# Altium PCB ch32v003f4p6.PcbDoc
Units mm, origin at the board's own origin, x right, y up, seen from the top; angles counter-clockwise.
Board outline 34.68 x 28.58 mm, 2 copper layers (Top Layer, Bottom Layer); 32 components, 41 nets, 129 pads, 48 vias.
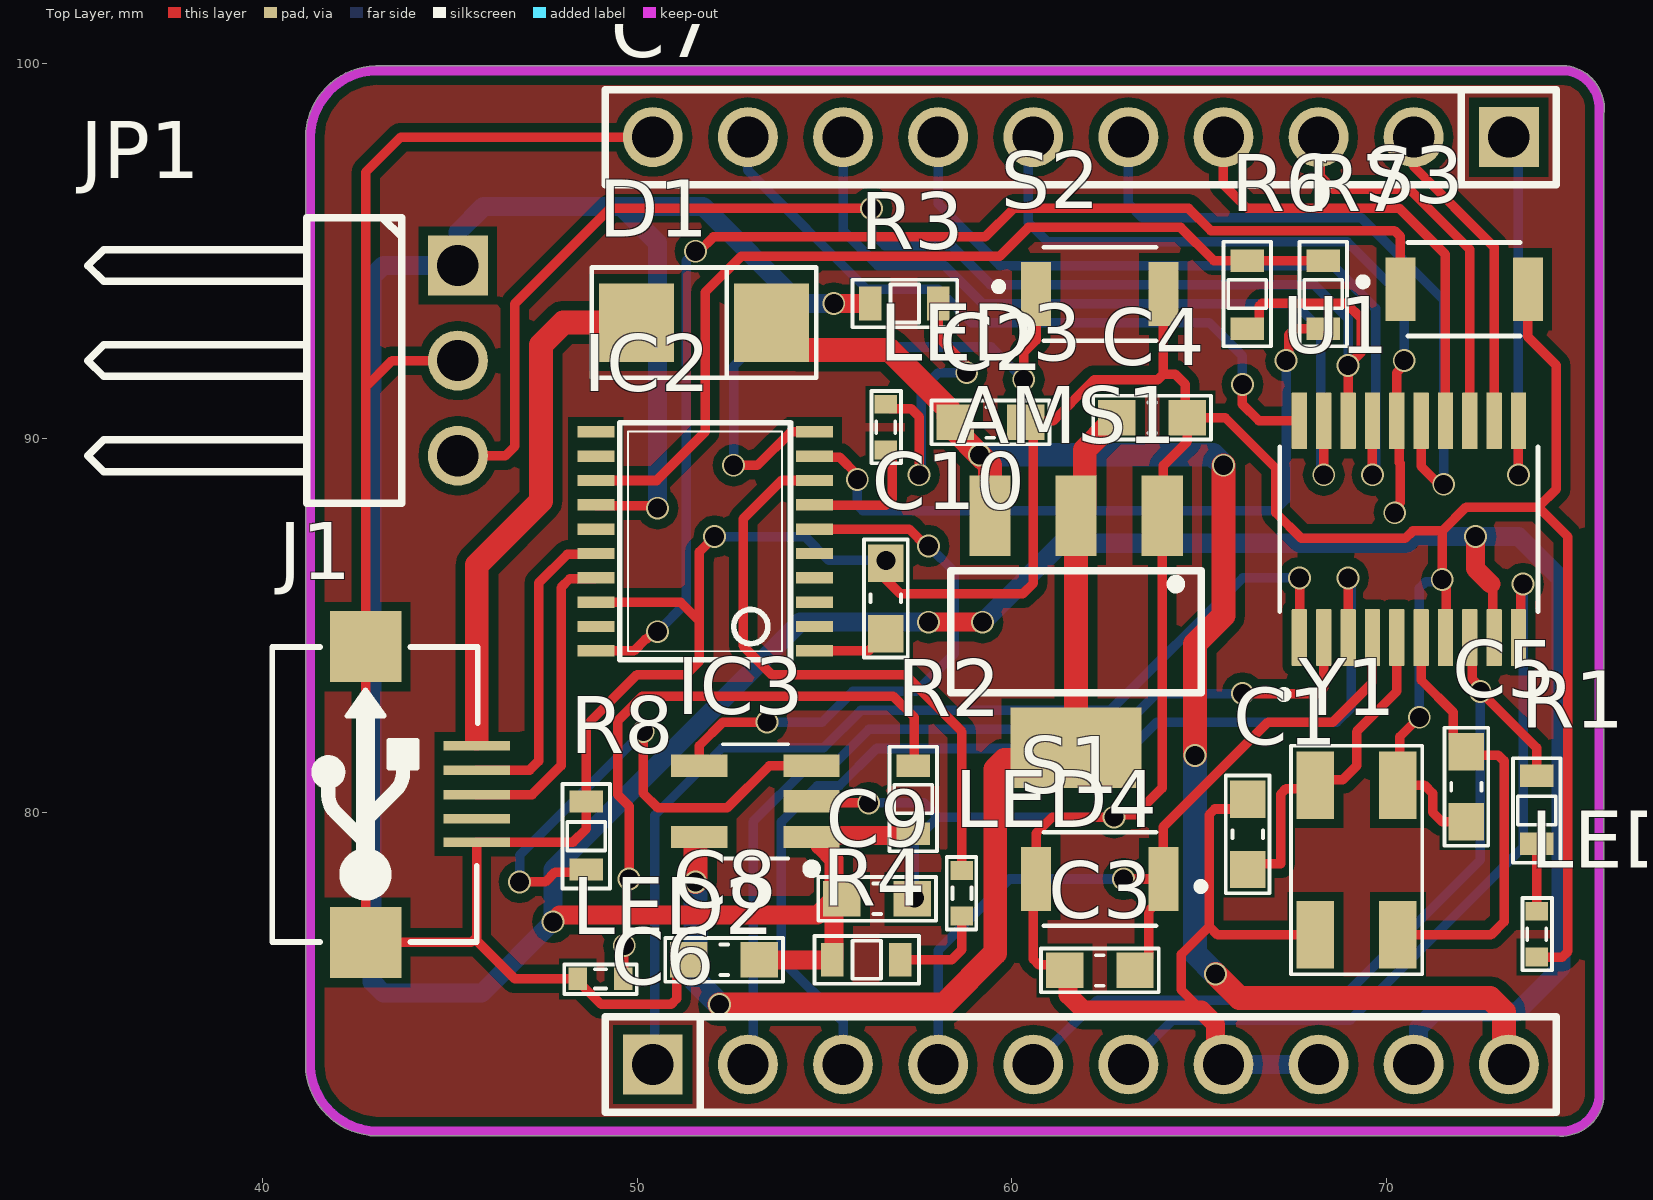
[diagram p0: Top Layer view]
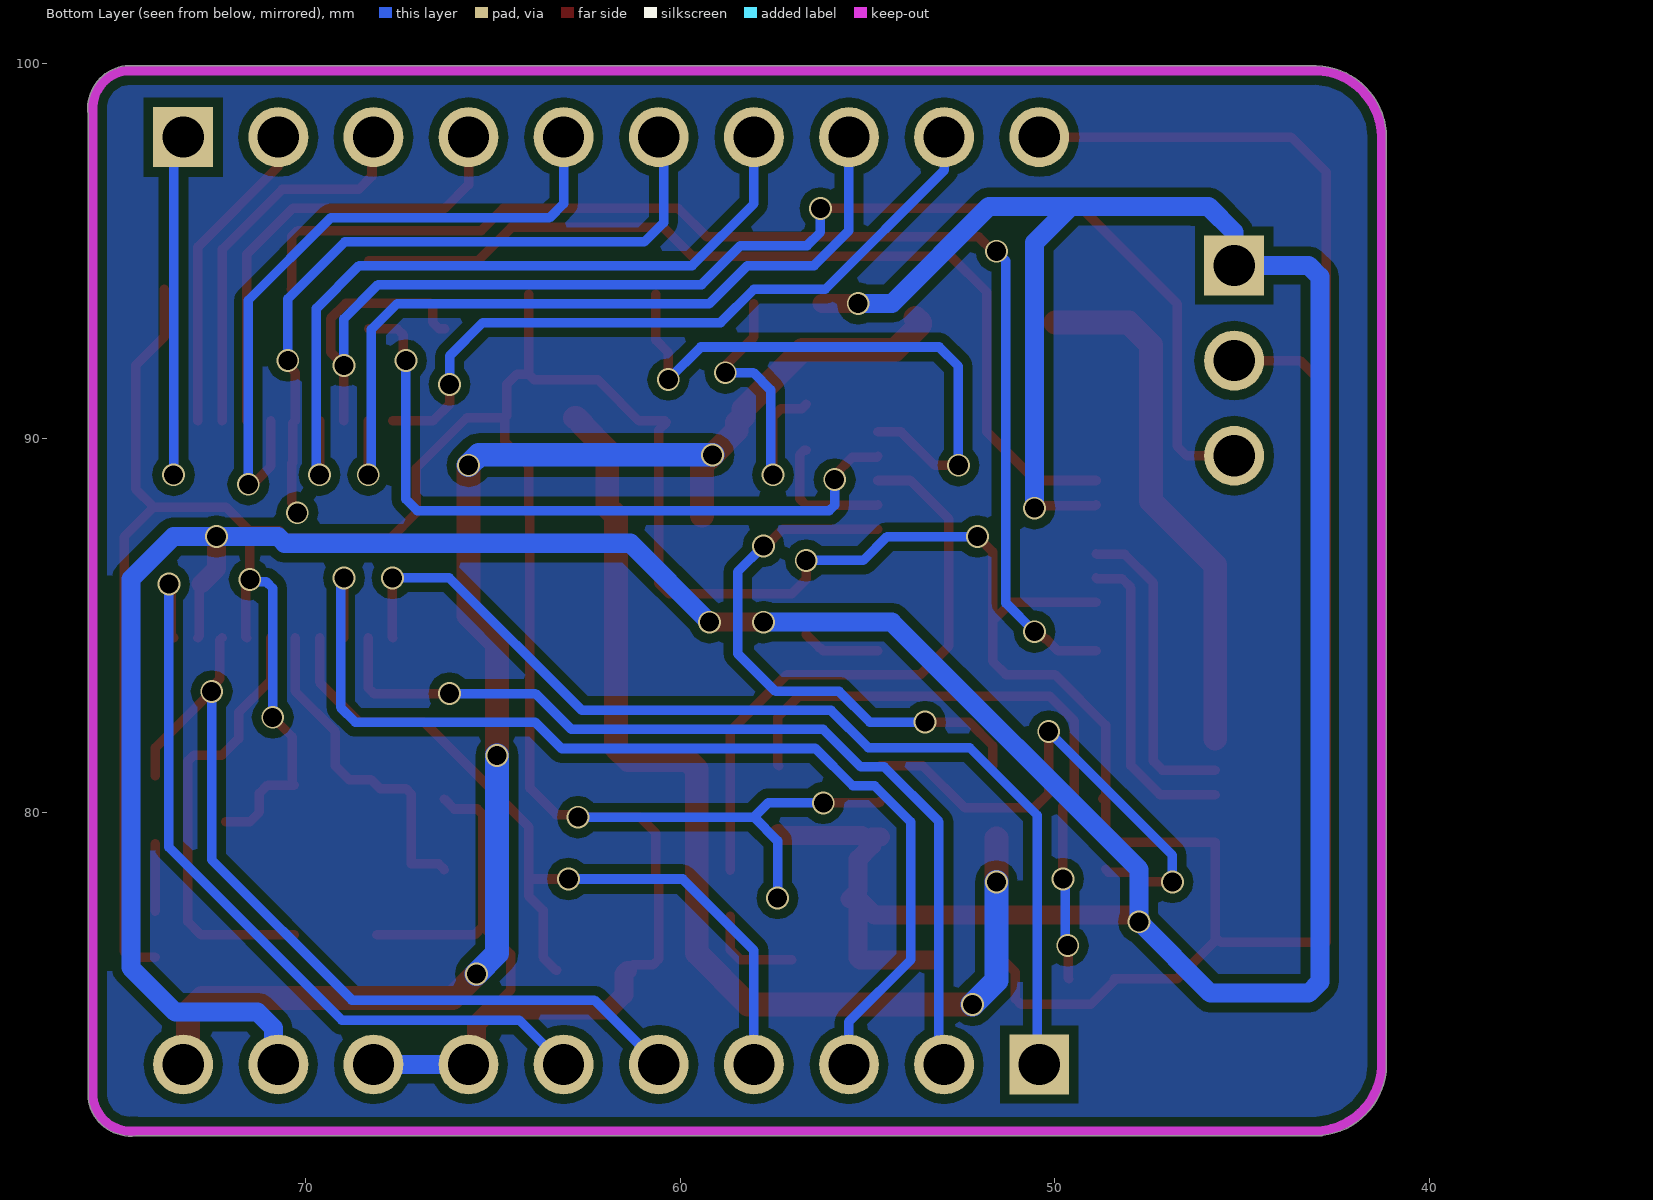
[diagram p1: Bottom Layer view, seen from below]
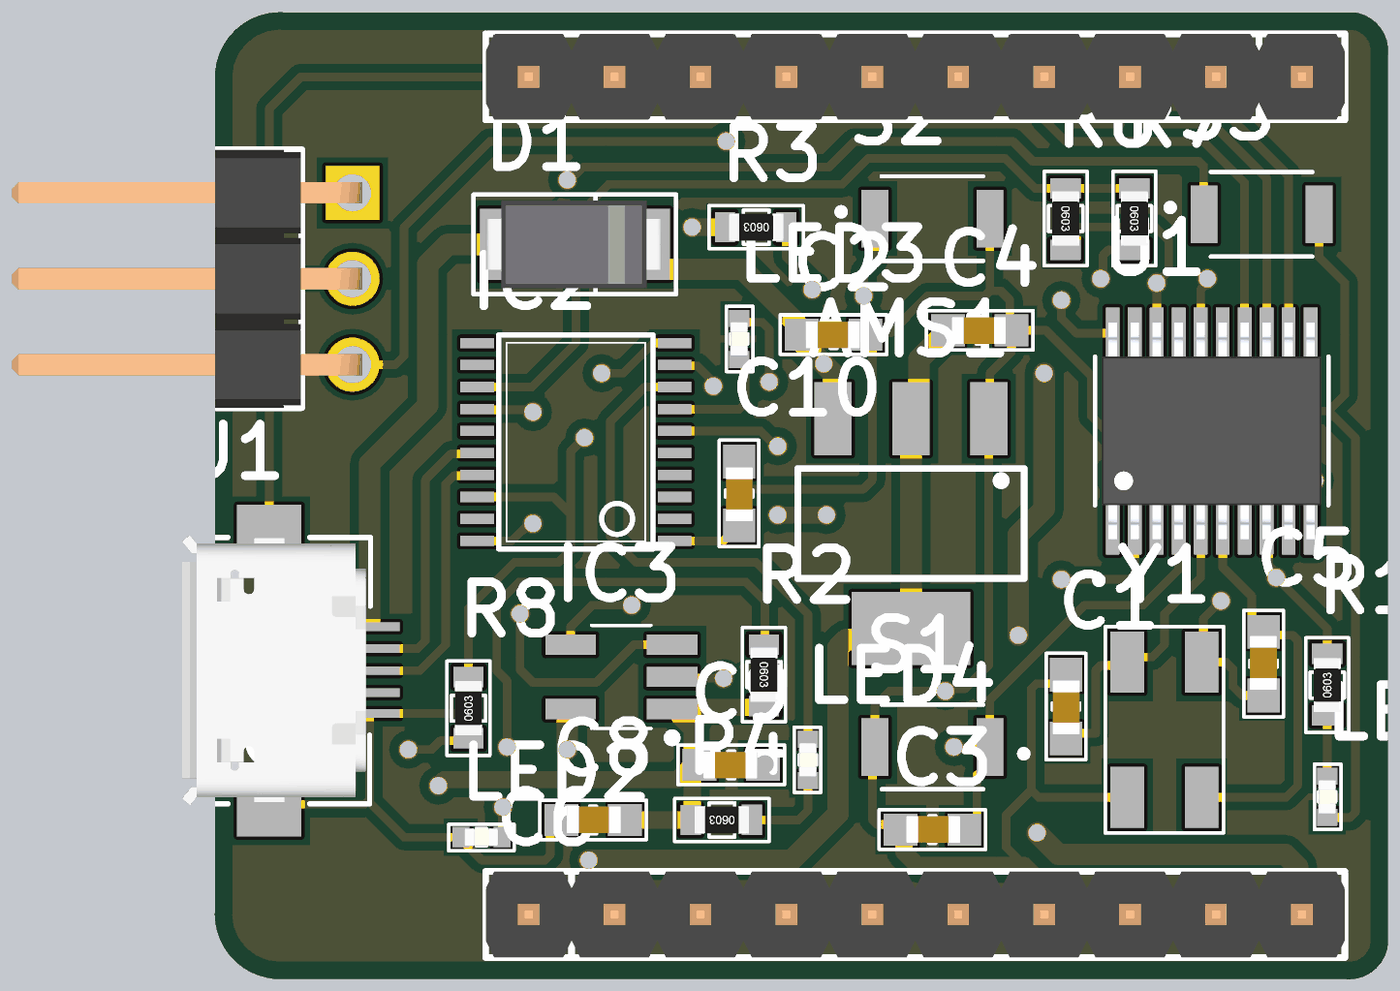
[diagram p2: 3D render of the assembled board from above, using the file's embedded part models]

## Layer stack, top to bottom
Top Solder: solder mask 0.0102, Solder Resist, Dk 3.5
Top Layer: signal copper 0.0356
Dielectric 1: dielectric 0.32, FR-4, Dk 4.8
Bottom Layer: signal copper 0.0356
Bottom Solder: solder mask 0.0102, Solder Resist, Dk 3.5

## Board outline
42.847,71.386 cw(c43.068,73.297) 41.148,73.411 41.148,98.029 cw(c43.071,98.029) 43.185,99.949 74.802,99.949 cw(c74.803,99.822) 74.819,99.948 cw(c74.676,98.806) 75.827,98.806 cw(c74.676,98.806) 75.819,98.671 75.819,72.39 cw(c75.692,72.39) 75.818,72.374 cw(c74.676,72.517) 74.541,71.374 42.902,71.374 cw(c42.902,71.501)

## Design rules (kind name [scope] priority, off if disabled: settings)
Clearance [All] p1: gap=0.254 ignorepadtopadclearanceinfootprint=FALSE except(0: Arc-Hole Track-Hole SMDPad-Hole THPad-Hole Via-Hole Fill-Hole Poly-Hole Region-Hole Text-Hole)
PolygonConnect [All] p1: connectstyle=Relief reliefconductorwidth=0.254 reliefentries=4 polygonreliefangle="90 Angle" airgapwidth=0.254
RoutingVias [All] p1: holewidth=0.406 width=0.61 viastyle="Through Hole" minholewidth=0.406 minwidth=0.61 maxholewidth=0.508 maxwidth=0.61
SolderMaskExpansion [All] p1: expansion=0.102
Width [All] p1: maxlimit=0.635 minlimit=0.254 preferedwidth=0.508 minimp=50.000000 maximp=50.000000 favimp=50.000000
30 further rules are at their usual default settings.

## Components (designator, comment, footprint, x,y, rotation, side; value= is the part's Value field where it differs from the comment)
AMS1 "AMS1117-3.3V" SOT223 61.722,84.836 r180 top value="AMS1117-3.3V SOT223"
C1 "104" CAP_0603 66.305,79.425 r270 top value=33p
C2 "104" CAP_0603 59.436,90.424 r180 top value=33p
C3 "104" CAP_0603 62.357,75.79 r0 top value=33p
C4 "104" CAP_0603 63.754,90.551 r180 top value=33p
C5 "104" CAP_0603 72.147,80.695 r90 top value=33p
C6 "JP10" JP10-D1T 50.419,73.279 r0 top
C7 "JP10" JP10-D1T 73.279,98.044 r180 top
C8 "104" CAP_0603 52.324,76.073 r0 top value=33p
C9 "104" CAP_0603 56.41,77.702 r180 top value=33p
C10 "104" CAP_0603 56.642,85.725 r270 top value=33p
D1 "1N4007" DIO-214AC(SMA) 51.862,93.04 r180 top
IC2 "CH32V305FBP6" TSSOP-20 51.816,87.249 r90 top
IC3 "DIO7002BST5" SOT23-5 53.161,80.303 r180 top
J1 "USB-5" USB-M1 45.72,80.488 r90 top
JP1 "JP 1x3 2.54" "JP 1x3 DC" 42.672,88.265 r270 top
LED1 "LED3" CAP_0402 74.026,76.758 r270 top
LED2 "LED3" CAP_0402 49.022,75.565 r180 top
LED3 "LED3" CAP_0402 56.642,90.297 r270 top
LED4 "LED3" CAP_0402 58.674,77.851 r90 top
R1 "1k" RES-SMD-0603 74.026,80.06 r90 top value="R1/4W - 1K"
R2 "1k" RES-SMD-0603 57.376,80.369 r270 top value="R1/4W - 1K"
R3 "1k" RES-SMD-0603 57.15,93.599 r180 top value="R1/4W - 1K"
R4 "1k" RES-SMD-0603 56.134,76.073 r180 top value="R1/4W - 1K"
R6 "100R" RES-SMD-0603 66.294,93.853 r270 top value="R1/4W - 1K"
R7 "100R" RES-SMD-0603 68.326,93.853 r270 top value="R1/4W - 1K"
R8 "15k" RES-SMD-0603 48.641,79.375 r90 top value="R1/4W - 1K"
S1 "B3U-1000P" SW_B3U-1000P 62.357,78.232 r180 top
S2 "B3U-1000P" SW_B3U-1000P 62.357,93.853 r0 top
S3 "B3U-1000P" SW_B3U-1000P 72.087,93.98 r0 top
U1 "CH32V003F4P6" SOP65P640X121-20N 70.612,87.574 r90 top
Y1 "24MHz" "Crystal 4 pin SMD 50x32" 69.215,78.74 r270 top

## Footprints (in the part's own frame and the unit in brackets; to place one, negate y for a bottom-side part, rotate by r counter-clockwise, add the part's x,y. Pads: shape width x height; smd on the part's side, far side on the other; paste and mask are expansions set on the pad)
CAP_0402 [mm]
  rect 0.5x0.6 smd: 1(-0.61,0) 2(0.61,0)
  silkscreen extent -0.97,-0.38 0.97,0.41, body extent -0.5,-0.27 0.5,0.26, height 0.35
CAP_0603 [mm]
  rect 1x0.95 smd mask+0.076: 1(-0.94,0) 2(0.94,0)
  silkscreen extent -1.57,-0.58 1.57,0.58, body extent -0.77,-0.39 0.83,0.41, height 0.9
"Crystal 4 pin SMD 50x32" [mm] "Quartz Crystal, SM; Body 6.0 x 3.5 mm (LxW)"
  rect 1.8x1 smd: 1(-2,-1.1) 2(2,-1.1) 3(2,1.1) 4(-2,1.1)
  silkscreen extent -3.05,-1.75 3.05,1.75, body extent -2.48,-1.6 2.53,1.6, height 0.9
DIO-214AC(SMA) [mm] "DO-214AC Diode Smallest Size"
  rect 2x2.1 smd: 1(1.88,-0.051) 2(-1.732,-0.051)
  silkscreen extent -2.92,-1.52 3.07,1.42, body extent -2.5,-1.35 2.7,1.25, height 2.4
JP10-D1T [mm] "10 pins, 1 row, straight, gold plating"
  rect 1.6x1.6 hole 1.1: 1(0,0)
  round 1.6 hole 1.1: 2(2.54,0) 3(5.08,0) 4(7.62,0) 5(10.16,0) 6(12.7,0) 7(15.24,0) 8(17.78,0) 9(20.32,0) 10(22.86,0)
  silkscreen extent -1.27,-1.27 24.13,1.27, body extent -1.27,-1.27 24.13,1.27, height 8.54
"JP 1x3 DC" [mm]
  rect 1.6x1.6 hole 1.1: 1(-6.35,2.54)
  round 1.6 hole 1.1: 2(-3.81,2.54) 3(-1.27,2.54)
  silkscreen extent -7.62,-7.34 0,1.04, body extent -7.62,-7.52 0,2.84, height 2.55
RES-SMD-0603 [mm]
  rect 0.6x0.9 smd: 1(-0.889,0) 2(0.927,0)
  silkscreen extent -1.4,-0.64 1.4,0.64, body extent -0.8,-0.4 0.8,0.4, height 0.43
SOP65P640X121-20N [mm]
  rrect12% 1.52x0.41 smd: 1(-2.895,2.925) 2(-2.895,2.275) 3(-2.895,1.625) 4(-2.895,0.975) 5(-2.895,0.325) 6(-2.895,-0.325) 7(-2.895,-0.975) 8(-2.895,-1.625) 9(-2.895,-2.275) 10(-2.895,-2.925) 11(2.895,-2.925) 12(2.895,-2.275) 13(2.895,-1.625) 14(2.895,-0.975) 15(2.895,-0.325) 16(2.895,0.325) 17(2.895,0.975) 18(2.895,1.625) 19(2.895,2.275) 20(2.895,2.925)
  silkscreen extent -4.51,-3.45 2.2,3.45, body extent -3.2,-3.25 3.2,3.25, height 1.1
SOT23-5 [mm] "SOT23, 5-Leads, Body 3.0x3.0mm (max), Pitch 0.95mm, IPC Medium Density"
  rect 1.5x0.6 smd: 1(-1.5,0.95) 2(-1.5,0) 3(-1.5,-0.95) 4(1.5,-0.95) 5(1.5,0.95)
  silkscreen extent -1.63,-1.52 0.87,1.92, body extent -1.75,-1.52 1.75,1.53, height 1.45
SOT223 [mm] "SOT-223/SC-73; 4 Leads; Body 6.7 x 7.3 mm, inc. leads (LxW max)"
  rect 1.1x2.15 smd: 1(-2.3,-3.1) 2(0,-3.1) 3(2.3,-3.1)
  rect 3.5x2.15 smd: 4(0,3.1)
  silkscreen extent -3.35,-1.63 3.35,1.63, body extent -3.43,-1.65 3.43,1.65, height 2.54
SW_B3U-1000P [mm]
  rect 0.8x1.7 smd: 1(-1.7,0) 2(1.7,0)
  silkscreen extent -2.8,-1.25 1.5,1.25
TSSOP-20 [mil] "TSSOP-20"
  rect 12x39 smd: 1(-115.16,-114.87) 2(-89.57,-114.87) 3(-63.98,-114.87) 4(-38.39,-114.87) 5(-12.8,-114.87) 6(12.8,-114.87) 7(38.39,-114.87) 8(63.98,-114.87) 9(89.57,-114.87) 10(115.16,-114.87) 11(115.16,114.87) 12(89.57,114.87) 13(63.98,114.87) 14(38.39,114.87) 15(12.8,114.87) 16(-12.8,114.87) 17(-38.39,114.87) 18(-63.98,114.87) 19(-89.57,114.87) 20(-115.16,114.87)
  silkscreen extent -125,-90 125,90
USB-M1 [mil]
  rect 10x70 smd: 1(51.18,0) 2(25.59,0) 3(0,0) 4(-25.59,0) 5(-50,0)
  rect 74.8x74.8 smd: 5(-155.51,116.84) 5(155.51,116.84)
  silkscreen extent -155,-1 155,215, body extent -157,5 158,218, height 107

## Part data
AMS1: library part "AMS1117 SMD", "Dán", Chung_Loai=Dán, Don_Vi=Con, Ma_Hang=MH000596
C1 C2 C3 C4 C5 C8 C9 C10: library part CapSMD, "Capacitor", LatestRevisionDate=17-Jul-2002, LatestRevisionNote="Re-released for DXP Platform.", PackageReference=RAD-0.3, Published=8-Jun-2000, Publisher="Altium Limited"
C6 C7: "WR-PHD 2.54 mm Angled Socket Header", Manufacturer="W¨¹rth Elektronik eiSos GmbH", partNo=613010143121, ComponentLink1 Description=Manufacturer, ComponentLink1URL=http://www.we-online.com, ComponentLink2 Description=Datasheet, ComponentLink2URL=http://katalog.we-online.de/em/datasheet/6130xx143121.pdf, Created by="Karrer Zheng", Created Date="29 March 2013", NoPins=10
D1: library part D1A, "Diode 1A"
IC3: library part "DIO7002BST5 SMD"
J1: Manufacturer=FCI, Manufacturer Part Number=10118193-0001LF, Supplier Part Number 1=609-4616-1-ND, .Checked PCB=RF, .Checked SCH=MM, .Creator=MM, Category="Connectors, Interconnects", ComponentLink1Description=http://portal.fciconnect.com/Comergent//fci/drawing/10118193.pdf, ComponentLink1URL=http://portal.fciconnect.com/Comergent//fci/drawing/10118193.pdf, Connector Type="USB - micro B", Features="Shielded, Solder Retention", Gender=Receptacle, Ingress Protection=-, Mounting Type="Surface Mount, Right Angle, Horizontal", Number of Contacts=5, Packaging="Cut Tape (CT)", Pricing 1="1=0.46, 10=0.433, 25=0.3712, 50=0.3156, 100=0.3032, 250=0.27224, 500=0.25988 (USD)", RoHS="RoHS Compliant", Specifications="USB 2.0", Stock 1=28642, Supplier 1=Digi-Key
JP1: library part "JP 1x3 2.54 Duc Cong", "C?m", Chung_Loai=C?m, Don_Vi=Con, Ma_Hang=MH000904, Ten_Linh_Kien="Jump Ðon Ð?c 2.54MM 1x40P Cong Ð?ng"
LED1 LED2 LED3 LED4: library part LED0805, "LED SMD 0805"
R1 R2 R3 R4 R6 R7 R8: library part RES, "Resistor 1/4W"
S1 S2 S3: "Switch Tactile N.O. SPST Round Button Gull Wing 0.05A 12VDC 1.5N SMD Embossed T/R", Package=None, Availability=Unavailable, MP=B3U-1000P, Price=None
U1: "Industrial-grade general-purpose microcontroller", Package=Package, Check_prices=https://www.snapeda.com/parts/CH32V003F4P6/WCH/view-part/?ref=eda, MF=WCH, MP=CH32V003F4P6, SnapEDA_Link=https://www.snapeda.com/parts/CH32V003F4P6/WCH/view-part/?ref=snap
Y1: library part "XTAL_4Pin SMD", "Crystal Oscillator", LatestRevisionDate=17-Jul-2002, LatestRevisionNote="Re-released for DXP Platform.", PackageReference=R38, Published=8-Jun-2000, Publisher="Altium Limited"

## Via types
v1: diameter 0.61, hole 0.508, Top Layer to Bottom Layer, tented both sides, 48 vias

## Nets (pads, with @x,y where several pads share a name; then routed paths per layer and width w, separated by ;. In a path a pad name is that pad's centre, name@x,y a point inside that pad or via, vN(x,y) a via of type N, cw(c..) or ccw(c..) an arc to the next point about the centre after c; other vN are vias at no path point)
3V3: C6.9 C8.2 C9.2 IC2.14 IC3.1 JP1.1 R2.2 R3.2 R4.2 U1.9 | length 117.7
  Top Layer w0.254: IC2.14 48.924,88.199 50.482,88.199 v1(50.546,88.135) ; 72.803,86.106 72.851,86.058 72.851,84.715 U1.9
  Top Layer w0.508: v1(47.752,77.089) 47.93,77.267 54.818,77.267 C9.2@55.253,77.702 ; C8.2 R4.2 55.253,76.119 C9.2@55.253,77.702 ; IC3.1 IC3.1@54.886,79.353 ; v1(55.253,93.599) R3.2 ; R2.2 57.331,79.398 55.155,79.398 54.886,79.128 55.253,78.761 55.253,77.919 C9.2 C9.2@55.253,77.702 ; v1(57.785,85.09) v1(59.226,85.09) ; v1(72.39,87.376) 72.39,86.519 72.803,86.106
  Bottom Layer w0.508: v1(50.546,88.135) 50.546,95.225 49.581,96.19 ; v1(55.253,93.599) 54.356,93.599 51.765,96.19 49.581,96.19 ; v1(57.785,85.09) 54.356,85.09 47.752,78.486 v1(47.752,77.089) 45.847,75.184 43.224,75.184 42.926,75.482 42.926,94.317 43.224,94.615 JP1.1 45.212,95.504 45.898,96.19 49.581,96.19 ; v1(59.226,85.09) 61.334,87.198 70.568,87.198 70.745,87.376 73.539,87.376 74.676,86.239 74.676,75.863 73.489,74.676 71.291,74.676 70.866,74.251 70.866,73.406 C6.9
3V3IN: AMS1.2 AMS1.4 C4.2 IC3.5 | length 29.2
  Top Layer w0.635: v1(51.562,78.154) IC3.5@51.562,79.318 ; v1(52.197,74.884) 58.197,74.884 59.563,76.25 59.563,81.162 59.808,81.407 61.393,81.407 AMS1.4 AMS1.2 61.955,88.168 61.955,89.691 62.632,90.368 62.632,90.393 62.789,90.551 C4.2
  Bottom Layer w0.635: v1(51.562,78.154) 51.562,75.519 v1(52.197,74.884)
5VIN: AMS1.3 C2.2 C6.10 D1.2 | length 39.5
  Top Layer w0.635: D1.2@53.721,93.218 D1.2 53.594,93.041 54.277,92.358 56.74,92.358 58.314,90.785 58.314,90.582 58.471,90.424 C2.2 58.496,90.207 v1(59.144,89.559) 59.422,89.281 AMS1.3 ; v1(64.897,81.534) 64.897,84.506 65.659,85.268 v1(65.659,89.281) ; v1(65.45,75.696) 66.089,75.057 72.78,75.057 73.152,74.685 73.152,73.406 C6.10
  Bottom Layer w0.635: v1(59.144,89.559) 65.381,89.559 v1(65.659,89.281) ; v1(64.897,81.534) 64.897,76.249 v1(65.45,75.696)
D+: IC2.17 J1.3 | length 8.4
  Top Layer w0.254: J1.3 47.197,80.488 47.969,81.26 47.969,86.016 48.201,86.249 48.873,86.249 IC2.17
D-: IC2.16 J1.2 | length 8.4
  Top Layer w0.254: J1.2 47.128,81.138 47.371,81.381 47.371,86.137 48.133,86.899 48.873,86.899 IC2.16
D_SWCLK: IC2.15
D_SWDIO: IC2.13 R6.1 R7.1 | length 24.8
  Top Layer w0.254: IC2.13 50.52,88.874 51.816,90.17 51.816,93.902 52.783,94.869 59.69,94.869 60.452,95.631 64.516,95.631 65.405,94.742 R6.1 R7.1
GND: AMS1.1 C1.1 C2.1 C3.1 C4.1 C5.1 C6.7 C6.8 C7.10 C8.1 C9.1 C10.1 IC2.18 IC3.2 J1.5 JP1.2 LED1.2 LED2.2 R8.2 S1.2 S2.2 S3.2 U1.7 Y1.2 Y1.4 | length 172.6
  Top Layer w0.254: JP1.2 43.456,92.075 42.752,91.371 ; R8.2 48.641,79.569 48.29,79.218 45.72,79.218 45.72,76.687 ; R8.2@48.716,80.377 48.641,80.452 48.641,82.334 50,83.693 51.308,83.693 51.66,84.045 51.66,85.123 ; IC2.18 51.159,85.624 51.66,85.123 ; C7.10 43.688,98.044 42.752,97.108 42.752,91.371 ; C8.1 51.058,75.747 51.058,75.033 50.909,74.884 49.043,74.884 48.412,75.515 LED2.2 46.736,75.565 45.72,76.581 45.72,76.687 ; v1(52.07,87.376) 51.66,86.966 51.66,85.123 ; IC3.2 54.7,80.264 v1(56.185,80.264) ; C10.1 56.642,86.233 57.023,85.852 60.304,85.852 60.579,86.127 60.579,90.221 C2.1 60.423,90.471 61.12,90.471 61.595,90.946 61.591,90.95 62.209,91.567 63.908,91.567 64.057,91.716 ; C9.1 57.382,77.702 v1(57.404,77.724) ; C3.1 61.268,75.939 60.728,75.939 60.579,76.088 60.579,78.154 S1.2 60.657,79.452 61.088,79.883 v1(62.738,79.883) 62.806,79.951 63.314,79.951 64.022,80.659 AMS1.1 64.057,87.971 64.057,89.279 64.694,89.916 C4.1 ; S2.2 64.057,91.716 ; 65.075,74.727 64.532,75.271 64.532,76.216 65.278,76.962 ; C1.1 66.042,80.101 65.427,80.101 65.278,79.953 65.278,76.962 ; Y1.2 65.5,76.74 65.278,76.962 ; v1(70.888,82.55) 70.367,82.029 70.367,80.792 Y1.4 71.025,80.74 71.247,80.518 71.247,80.01 71.502,79.755 C5.1 ; U1.7 71.607,84.7 71.607,86.127 v1(71.501,86.233) 71.501,87.529 ; S3.2 73.787,92.71 74.549,91.948 74.549,88.646 74.067,88.164 ; LED1.2 74.707,76.148 74.857,76.298 74.857,87.373 74.067,88.164 ; 42.752,91.371 42.752,84.438 42.752,76.538 45.571,76.538 45.72,76.687 ; 64.057,91.716 64.367,91.716 64.643,91.44 64.643,90.602 C4.1 ; C4.1 65.706,90.551 67.056,89.201 67.056,88.011 67.742,87.325 70.515,87.325 70.718,87.529 71.501,87.529 ; 71.501,87.529 72.136,88.164 74.067,88.164
  Top Layer w0.508: C3.1 61.512,75.696 61.512,75.14 61.925,74.727 65.075,74.727 65.45,74.353 65.45,73.488 C6.7
  Bottom Layer w0.254: v1(52.07,87.376) 54.483,87.376 55.118,86.741 v1(56.642,86.741) ; v1(56.185,80.264) 57.658,80.264 58.039,79.883 ; v1(57.404,77.724) 57.404,79.248 58.039,79.883 ; v1(62.738,79.883) 58.039,79.883 ; v1(70.888,82.55) 70.888,85.997 71.056,86.165 71.433,86.165 v1(71.501,86.233)
  Bottom Layer w0.508: C6.7 C6.8
IAP: IC2.10 S2.1 | length 15.9
  Top Layer w0.254: v1(52.578,89.281) 53.213,89.281 54.106,90.174 IC2.10 ; v1(60.325,91.567) 60.325,92.29 60.657,92.622 S2.1
  Bottom Layer w0.254: v1(52.578,89.281) 52.578,91.926 53.091,92.439 59.453,92.439 v1(60.325,91.567)
LED_CON: IC2.8 LED4.2 | length 16.2
  Top Layer w0.254: IC2.8 53.857,88.874 52.832,87.849 52.832,84.455 53.594,83.693 57.15,83.693 58.674,82.169 LED4.2
LED_RUN: IC2.7 LED3.2 | length 3.6
  Top Layer w0.254: IC2.7 54.744,88.214 56.641,88.214 56.82,88.393 56.82,89.559 56.692,89.687 LED3.2
MODES: IC2.20 S3.1 | length 33.5
  Top Layer w0.254: IC2.20 49.913,84.324 50.222,84.633 50.247,84.633 50.45,84.836 v1(50.546,84.836) ; v1(51.562,94.996) 51.658,94.996 52.039,95.377 59.295,95.377 60.057,96.139 64.726,96.139 65.318,95.548 70.225,95.548 70.374,95.399 70.374,93.993 S3.1
  Bottom Layer w0.254: v1(50.546,84.836) 51.308,85.598 51.308,94.742 v1(51.562,94.996)
NetC10_2: C10.2 IC2.1 | length 2.1
  Top Layer w0.254: IC2.1 56.181,84.324 56.269,84.412 56.294,84.412 56.642,84.76 C10.2
NetIC3_3: IC3.3 R8.1 | length 14.1
  Top Layer w0.254: v1(46.863,78.154) 47.549,78.154 47.81,78.415 48.57,78.415 R8.1 ; v1(50.165,82.169) 50.165,80.518 50.546,80.137 52.414,80.137 53.53,81.253 IC3.3
  Bottom Layer w0.254: v1(46.863,78.154) 46.863,78.867 v1(50.165,82.169)
NetLED1_1: LED1.1 R1.1 | length 1.8
  Top Layer w0.254: LED1.1 R1.1
NetLED2_1: LED2.1 R2.1 | length 16.8
  Top Layer w0.254: LED2.1 49.644,75.578 49.644,76.441 v1(49.657,76.454) ; v1(49.784,78.232) 49.784,80.181 49.479,80.486 49.479,82.453 50.135,83.109 56.845,83.109 57.404,82.55 57.404,81.286 R2.1
  Bottom Layer w0.254: v1(49.657,76.454) 49.721,76.517 49.721,78.168 v1(49.784,78.232)
NetLED3_1: LED3.1 R3.1 | length 8.4
  Top Layer w0.254: LED3.1 56.761,90.787 57.323,90.787 57.531,90.579 v1(57.531,89.027) ; R3.1 58.039,92.71 58.801,91.948 v1(58.801,91.753)
  Bottom Layer w0.254: v1(57.531,89.027) 57.594,89.09 57.594,91.296 58.052,91.753 v1(58.801,91.753)
NetLED4_1: LED4.1 R4.1 | length 2.7
  Top Layer w0.254: R4.1 58.398,76.073 58.674,76.349 LED4.1
PB12: IC2.5
PB13: IC2.6 IC3.4 | length 14.8
  Top Layer w0.254: IC3.4 51.661,81.79 52.293,82.423 v1(53.467,82.423) ; IC2.6 57.267,87.574 57.719,87.122 v1(57.785,87.122)
  Bottom Layer w0.254: v1(53.467,82.423) 54.946,82.423 55.764,83.241 57.46,83.241 58.471,84.252 58.471,86.436 v1(57.785,87.122)
PC0: C6.6 U1.10 | length 21
  Top Layer w0.254: U1.10 73.598,84.74 73.598,86.044 v1(73.66,86.106)
  Bottom Layer w0.254: C6.6@63.436,73.596 64.3,74.46 69.039,74.46 73.66,79.081 v1(73.66,86.106)
PC1: C7.1 U1.11 | length 10.6
  Top Layer w0.254: v1(73.537,89.027) U1.11
  Bottom Layer w0.254: C7.1 73.537,97.786 v1(73.537,89.027)
PC2: C7.2 U1.12 | length 8.5
  Top Layer w0.254: C7.2 70.739,97.26 72.887,95.112 U1.12
PC3: C7.3 U1.13 | length 10.4
  Top Layer w0.254: C7.3 68.237,98.006 68.237,97.001 68.591,96.647 70.634,96.647 72.237,95.044 U1.13
PC4: C7.4 U1.14 | length 12.4
  Top Layer w0.254: C7.4 65.659,96.774 66.294,96.139 70.358,96.139 71.587,94.91 U1.14
PC5: C7.5 U1.15 | length 18.2
  Top Layer w0.254: U1.15 70.937,89.253 71.417,88.773 v1(71.541,88.773)
  Bottom Layer w0.254: C7.5 63.119,96.266 63.5,95.885 69.342,95.885 71.541,93.686 v1(71.541,88.773)
PC6: C7.6 U1.16 | length 19.1
  Top Layer w0.254: v1(70.231,88.011) 70.231,88.135 70.374,88.277 70.374,89.332 70.351,89.355 70.351,90.405 U1.16 70.287,91.753 70.485,91.951 v1(70.485,92.075)
  Bottom Layer w0.254: C7.6 60.452,97.917 60.452,95.758 60.96,95.25 68.961,95.25 70.485,93.726 v1(70.485,92.075)
PC6_WCH: IC2.9 R7.2 | length 19.2
  Top Layer w0.254: IC2.9 54.759,89.499 55.408,89.499 55.88,89.027 v1(55.88,88.9) ; v1(67.332,92.075) 67.399,92.142 67.399,92.761 67.564,92.926 R7.2
  Bottom Layer w0.254: v1(55.88,88.9) 55.88,88.214 56.029,88.065 67.024,88.065 67.332,88.373 v1(67.332,92.075)
PC7: C7.7 U1.17 | length 20.5
  Top Layer w0.254: v1(69.637,89.027) U1.17
  Bottom Layer w0.254: C7.7 58.039,96.266 59.69,94.615 68.58,94.615 69.724,93.471 69.724,89.114 v1(69.637,89.027)
PD0: C6.5 R1.2 U1.8 | length 22.7
  Top Layer w0.254: U1.8 72.301,84.615 72.301,83.581 72.517,83.365 v1(72.517,83.241) 74.026,81.732 R1.2
  Bottom Layer w0.254: C6.5@60.896,73.596 62.297,74.997 68.774,74.997 72.517,78.74 v1(72.517,83.241)
PD2: C7.8 U1.19 | length 21.7
  Top Layer w0.254: v1(68.337,89.027) U1.19
  Bottom Layer w0.254: C7.8 55.499,95.548 56.432,94.615 58.21,94.615 59.226,93.599 67.564,93.599 68.25,92.913 68.25,89.114 v1(68.337,89.027)
PD3: C7.9 U1.20 | length 19.1
  Top Layer w0.254: v1(66.167,91.44) 66.167,90.907 66.605,90.469 U1.20 U1.20@67.689,90.471
  Bottom Layer w0.254: C7.9 52.959,97.155 56.134,93.98 58.039,93.98 58.928,93.091 65.278,93.091 66.167,92.202 v1(66.167,91.44)
PD4: C6.1 U1.1 | length 28.1
  Top Layer w0.254: U1.1 67.691,84.683 v1(67.691,86.274)
  Bottom Layer w0.254: C6.1 50.47,73.33 50.47,79.934 52.273,81.737 54.978,81.737 55.974,82.733 62.632,82.733 66.173,86.274 v1(67.691,86.274)
PD5: C6.2 U1.2 | length 24.3
  Top Layer w0.254: v1(66.167,83.185) 68.188,83.185 68.337,83.334 U1.2
  Bottom Layer w0.254: C6.2@53.276,73.596 53.096,73.777 53.096,79.766 54.559,81.229 55.189,81.229 56.185,82.225 62.911,82.225 63.871,83.185 v1(66.167,83.185)
PD6: C6.3 U1.3 | length 28.6
  Top Layer w0.254: U1.3 v1(68.987,86.274)
  Bottom Layer w0.254: C6.3@55.816,73.596 55.499,73.914 55.499,74.422 53.848,76.073 53.848,79.756 54.813,80.721 55.399,80.721 56.395,81.717 63.175,81.717 63.881,82.423 68.682,82.423 69.074,82.814 69.074,86.187 v1(68.987,86.274)
RST: C3.2 C6.4 S1.1 U1.4 | length 22.7
  Top Layer w0.254: v1(62.992,78.232) S1.1 ; C3.2 63.322,75.79 63.67,76.138 63.67,77.395 64.057,77.782 S1.1 ; U1.4 69.637,83.48 68.58,82.423 66.849,82.423 64.057,79.631 S1.1
  Bottom Layer w0.254: C6.4@58.674,73.279 58.039,73.914 58.039,76.327 59.944,78.232 v1(62.992,78.232)
RST-WHC: IC2.11
SWIO: JP1.3 R6.2 U1.18 | length 38.2
  Top Layer w0.254: JP1.3 46.482,89.535 46.736,89.789 46.736,93.599 49.276,96.139 v1(56.261,96.139) ; R6.2 66.444,92.926 66.617,93.099 66.617,93.541 66.683,93.607 68.934,93.607 69.342,93.199 69.342,92.303 v1(68.987,91.948) U1.18
  Bottom Layer w0.254: v1(56.261,96.139) 56.261,95.504 56.62,95.145 58.398,95.145 59.436,94.107 68.072,94.107 68.987,93.192 v1(68.987,91.948)
VCC: D1.1 J1.1 | length 14
  Top Layer w0.635: 45.72,81.978 45.72,86.614 47.434,88.328 47.434,92.496 48.03,93.091 D1.1
XI: C1.2 U1.5 Y1.1 | length 9
  Top Layer w0.254: C1.2 66.454,78.634 67.183,78.634 67.183,80.496 67.332,80.645 68.02,80.645 Y1.1 68.264,80.889 68.85,80.889 69.215,81.254 69.215,82.169 70.287,83.241 U1.5
XO: C5.2 U1.6 Y1.3 | length 11.9
  Top Layer w0.254: Y1.3 72.803,76.74 73.152,77.089 73.152,81.385 73.003,81.534 72.248,81.534 71.799,81.983 71.799,82.68 70.941,83.538 70.941,84.675 U1.6
pads on no net: IC2.2 IC2.3 IC2.4 IC2.12 IC2.19 J1.4

## Polygon pours and split planes (outlines as drawn)
no net on Top Layer "NONET_L01_P006" (solid, pour order 6): 74.93,71.501 75.692,72.263 75.692,99.06 74.93,99.822 72.517,99.822 42.752,99.822 42.545,99.822 42.418,99.695 42.164,99.695 41.91,99.441 41.91,99.314 41.402,98.806 41.402,98.298 41.275,98.171 41.275,72.898 41.402,72.771 41.402,72.517 42.291,71.628 42.418,71.628 42.418,71.501
no net on Top Layer "NONET_L01_P000" (solid, pour order 0): 41.656,99.314
no net on Bottom Layer "NONET_L02_P008" (solid, pour order 8): 41.275,72.771 41.529,72.517 41.529,72.263 42.037,71.755 42.291,71.755 42.545,71.501 75.057,71.501 75.311,71.755 75.438,71.755 75.438,71.882 75.692,72.136 75.692,99.187 75.057,99.822 42.545,99.822 42.291,99.568 42.037,99.568 41.656,99.187 41.656,99.06 41.402,98.806 41.402,98.679 41.275,98.552

## Keep-outs
Keep-Out Layer:
  lines w0.254: 42.902,71.501 74.549,71.501 ccw(c74.676,72.517) 75.692,72.39 75.692,98.933 ; 43.068,71.501 cw(c43.068,73.297) 41.275,73.407 41.275,98.029 cw(c43.071,98.029) 43.181,99.822 74.803,99.822 cw(c74.676,98.806) 75.692,98.679